# Altium PCB W5500-EVB-Pico_V100.PcbDoc
Units mm, origin at the board's own origin, x right, y up, seen from the top; angles counter-clockwise.
Board outline 75 x 21 mm, 2 copper layers (Top Layer, Bottom Layer); 88 components, 83 nets, 408 pads, 152 vias.
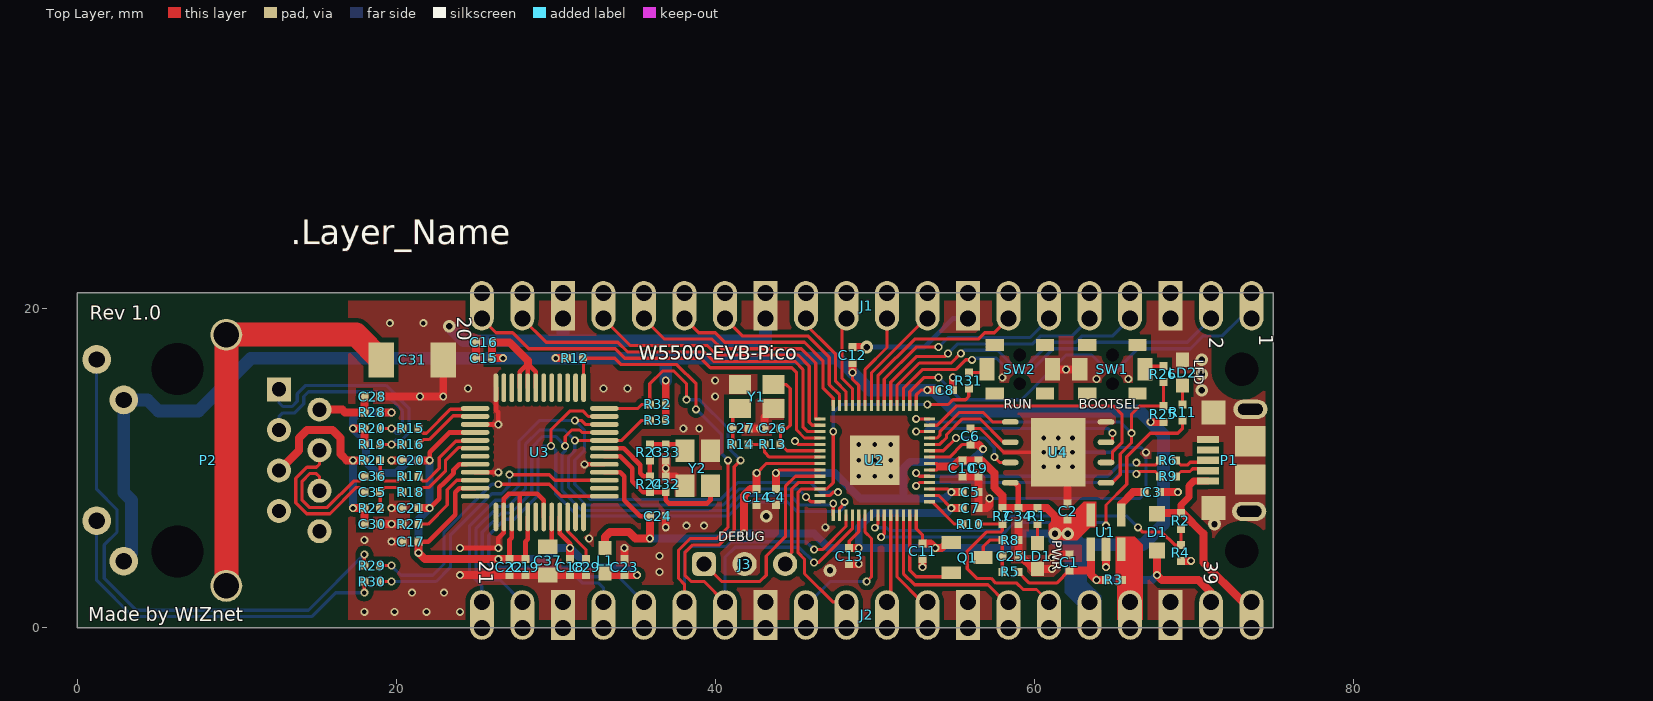
[diagram p0: Top Layer view]
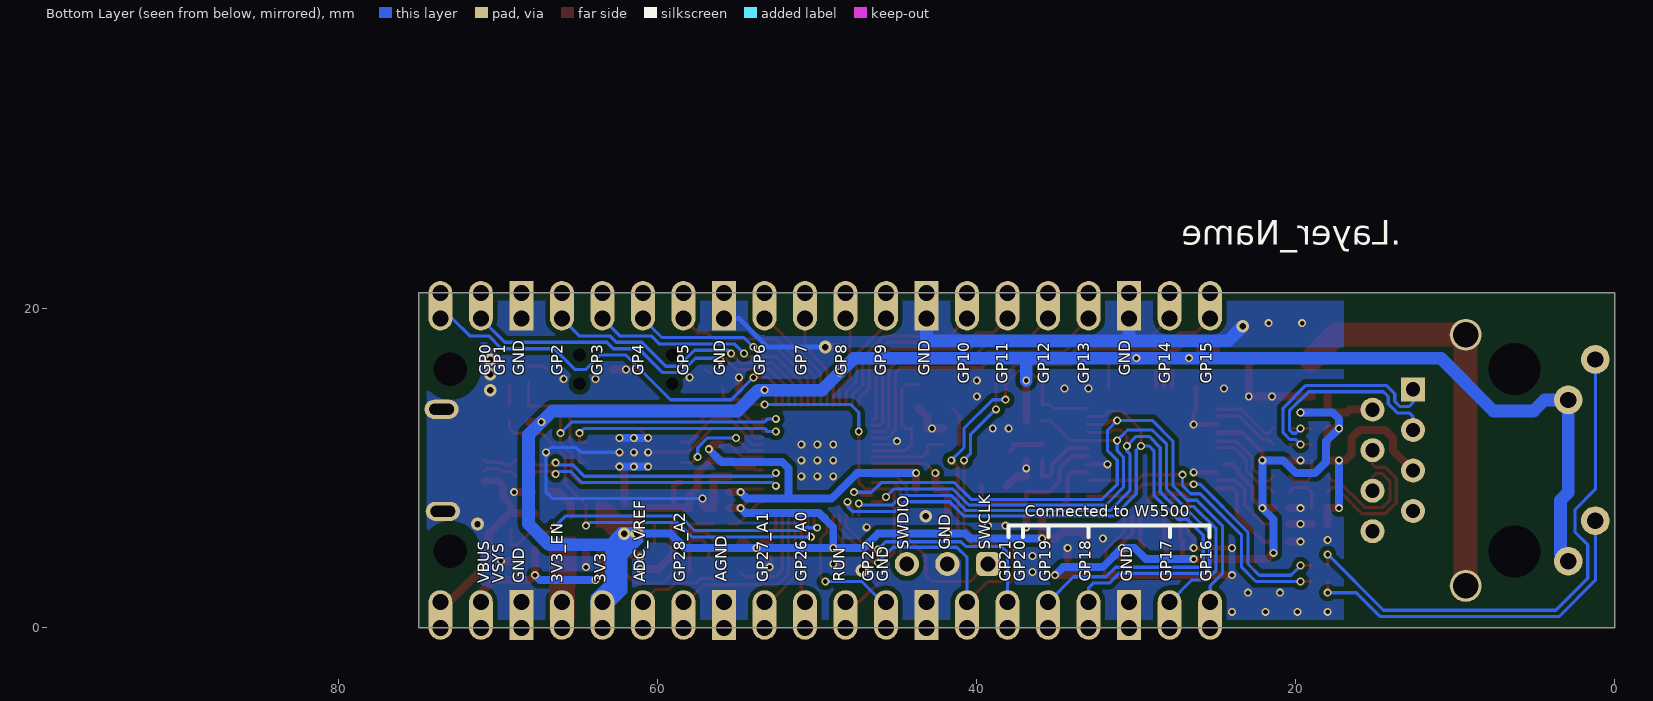
[diagram p1: Bottom Layer view, seen from below]
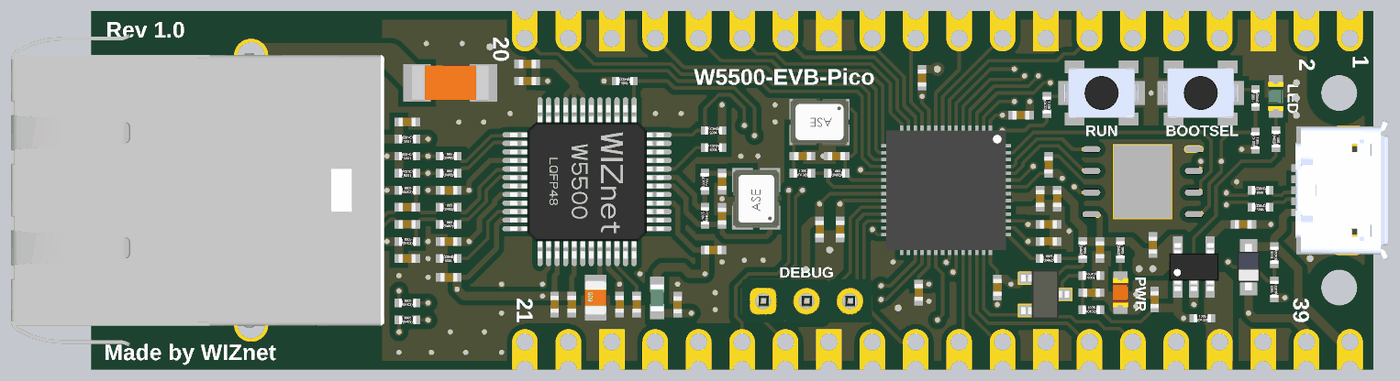
[diagram p2: 3D render of the assembled board from above, using the file's embedded part models]

## Layer stack, top to bottom
Top Solder: solder mask 0.0102, Solder Resist, Dk 3.5
Top Layer: signal copper 0.0356
Dielectric1: prepreg 0.32, FR-4, Dk 4.8
Bottom Layer: signal copper 0.0356
Bottom Solder: solder mask 0.0102, Solder Resist, Dk 3.5

## Board outline
0,0 75,0 75,21 0,21

## Design rules (kind name [scope] priority, off if disabled: settings)
BoardOutlineClearance [All] p1: gap=0.5 ignorepadtopadclearanceinfootprint=FALSE
Clearance [All] p1: gap=0.15 ignorepadtopadclearanceinfootprint=FALSE except(0.3: Arc-Poly Track-Poly SMDPad-Poly THPad-Poly Via-Poly Fill-Poly Poly-Poly Poly-Region Poly-Text Poly-Hole)
DiffPairsRouting [All] p1: maxlimit=0.2 minlimit=0.2 mostfreqgap=0.2 toplayer_minwidth=0.2 toplayer_maxwidth=0.2 toplayer_prefwidth=0.2 bottomlayer_minwidth=0.2 bottomlayer_maxwidth=0.2 bottomlayer_prefwidth=0.2 maxuncoupledlength=15.24
HoleSize [All] p1: absolutevalues=TRUE maxlimit=4.064 minlimit=0.025 maxpercent=80.000 minpercent=20.000
PlaneClearance [All] p1: clearance=0.3
PlaneConnect [All] p1: planeconnectstyle=Direct reliefexpansion=0.508 reliefentries=4 reliefconductorwidth=0.254 reliefairgap=0.254
PolygonConnect [All] p1: connectstyle=Direct reliefconductorwidth=0.6 reliefentries=4 polygonreliefangle="45 Angle" airgapwidth=0.35
RoutingVias [All] p1: holewidth=0.3 width=0.5 viastyle="Through Hole" minholewidth=0.3 minwidth=0.5 maxholewidth=0.5 maxwidth=0.8
SolderMaskExpansion [All] p1: expansion=0 istentingtop=FALSE
Width [All] p1: maxlimit=2 minlimit=0.1 preferedwidth=0.2 minimp=50.000000 maximp=50.000000 favimp=50.000000
26 further rules are at their usual default settings.

## Classes and differential pairs
differential pair NewDifferentialPair5: +NetC36_2 -NetC35_2
differential pair NewDifferentialPair4: +NetC36_1 -NetC35_1
differential pair NewDifferentialPair3: +NetR17_2 -NetR18_2
differential pair NewDifferentialPair2: +NetR15_2 -NetR16_2
differential pair NewDifferentialPair1: +NetP2_1 -NetP2_3

## Components (designator, comment, footprint, x,y, rotation, side; value= is the part's Value field where it differs from the comment)
C1 "1uF" CAP-0402 62.2,4.1 r270 top
C2 "1uF" CAP-0402 62.1,7.3 r270 top
C3 "0.1uF" CAP-0402 67.4,8.5 r180 top
C4 "1uF" CAP-0402 43.8,8.2 r90 top
C5 "0.1uF" CAP-0402 56,8.5 r180 top
C6 "0.1uF" CAP-0402 56,12 r270 top
C7 "1uF" CAP-0402 56,7.5 r180 top
C8 "0.1uF" CAP-0402 54.4,14.9 r180 top
C9 "0.1uF" CAP-0402 56.5,10 r90 top
C10 "0.1uF" CAP-0402 55.5,10 r90 top
C11 "0.1uF" CAP-0402 53,4.8 r90 top
C12 "0.1uF" CAP-0402 48.6,17.1 r270 top
C13 "0.1uF" CAP-0402 48.4,4.5 r90 top
C14 "0.1uF" CAP-0402 42.6,8.2 r90 top
C15 "0.1uF" CAP-0402 25.5,16.9 r0 top
C16 "0.1uF" CAP-0402 25.5,17.9 r0 top
C17 "1uF" CAP-0402 20.9,5.4 r0 top
C18 "0.1uF" CAP-0402 30.9,3.8 r90 top
C19 "0.1uF" CAP-0402 28.1,3.8 r90 top
C20 "1uF" CAP-0402 20.9,10.5 r0 top
C21 "0.1uF" CAP-0402 20.9,7.5 r0 top
C22 "0.1uF" CAP-0402 27.1,3.8 r90 top
C23 "0.1uF" CAP-0402 34.3,3.8 r270 top
C24 "1uF" CAP-0402 36.4,7 r180 top
C25 "0.1uF" CAP-0402 58.5,4.5 r0 top
C26 "15pF" CAP-0402 43.6,12.5 r180 top
C27 "15pF" CAP-0402 41.6,12.5 r0 top
C28 "22nF" CAP-0402 18.5,14.5 r180 top
C29 "0.1uF" CAP-0402 31.9,3.8 r90 top
C30 "0.1uF" CAP-0402 18.5,6.5 r180 top
C31 "1nF/2kV" CAP-1808 21,16.8 r180 top
C32 "18pF" CAP-0402 36.9,9 r270 top
C33 "18pF" CAP-0402 36.9,11 r90 top
C34 "0.1uF" CAP-0402 59,7 r90 top
C35 "6.8nF" CAP-0402 18.5,8.5 r180 top
C36 "6.8nF" CAP-0402 18.5,9.5 r180 top
C37 "4.7uF" CAP-0805 29.5,4.2 r90 top
D1 "BAT60A" SOD-323(1-C,2-A) 67.7,6 r90 top
J1 "2.54mm 1x20 Pin Header DIP" IDC-1X20 73.63,19.39 r180 top
J2 "2.54mm 1x20 Pin Header DIP" IDC-1X20 25.37,1.61 r0 top
J3 "2.54mm 1x3 Pin Header DIP" IDC-1X3 39.3,4 r0 top
L1 "HH-1M1608-121JT" IND-0603 33.1,4.2 r270 top
LD1 "Red" LED-0603-RED 60.2,4.5 r270 top
LD2 "Green" LED-0603-GREEN 69.3,16 r90 top
P1 "Micro USB" "MICRO 5P B DBX 6.4" 75,10.5 r180 top
P2 "J1B1211CCD" RJ45-J1B1211CCD -1.5,10.5 r270 top locked
Q1 "Q-2N7002" SOT23-3L 55.8,4.4 r270 top
R1 "470R" RES-0402 60.2,7 r270 top
R2 "5.6K" RES-0402 69.2,6.7 r90 top
R3 "100K" RES-0402 65,3 r0 top
R4 "10K" RES-0402 69.2,4.7 r90 top
R5 "200K" RES-0402 58.5,3.5 r0 top
R6 "27R" RES-0402 68.4,10.5 r180 top
R7 "200R" RES-0402 58,7 r270 top
R8 "100K" RES-0402 58.5,5.5 r180 top
R9 "27R" RES-0402 68.4,9.5 r180 top
R10 "1R" RES-0402 56,6.5 r0 top
R11 "470R" RES-0402 69.3,13.5 r270 top
R12 "4.7K" RES-0402 31.2,16.9 r180 top
R13 "NC" RES-0402 43.6,11.5 r0 top
R14 "1K" RES-0402 41.6,11.5 r0 top
R15 "3.3R" RES-0402 20.9,12.5 r0 top
R16 "3.3R" RES-0402 20.9,11.5 r0 top
R17 "3.3R" RES-0402 20.9,9.5 r0 top
R18 "3.3R" RES-0402 20.9,8.5 r0 top
R19 "49.9R" RES-0402 18.5,11.5 r180 top
R20 "49.9R" RES-0402 18.5,12.5 r180 top
R21 "49.9R" RES-0402 18.5,10.5 r0 top
R22 "49.9R" RES-0402 18.5,7.5 r0 top
R23 "0R" RES-0402 35.9,11 r270 top
R24 "1M" RES-0402 35.9,9 r90 top
R25 "NC" RES-0402 68.1,13.4 r270 top
R26 "1K" RES-0402 68.1,15.9 r90 top
R27 "12.4K/1%" RES-0402 20.9,6.5 r180 top
R28 "10R/1%" RES-0402 18.5,13.5 r180 top
R29 "470R" RES-0402 18.5,3.9 r0 top
R30 "470R" RES-0402 18.5,2.9 r0 top
R31 "1K" RES-0402 55.9,15.5 r270 top
R32 "4.7K" RES-0402 36.4,14 r180 top
R33 "4.7K" RES-0402 36.4,13 r180 top
SW1 "PTS820" PTS820 64.9,16.2 r180 top
SW2 "PTS820" PTS820 59.1,16.2 r0 top
U1 "LM8805SF5-33V" SOT-23-5L 64.5,6 r90 top
U2 "RP2040" QFN56(0.4/7X7) 50,10.5 r270 top locked
U3 "W5500" W5500-LQFP48 29,11 r0 top
U4 "W25Q16JVZPIM" WSON8(6X5_1.27) 61.5,11 r180 top
Y1 "12MHz" OSC-TZ1067B 42.6,14.5 r180 top
Y2 "25MHz" OSC-82J0626 38.9,10 r90 top

## Footprints (in the part's own frame and the unit in brackets; to place one, negate y for a bottom-side part, rotate by r counter-clockwise, add the part's x,y. Pads: shape width x height; smd on the part's side, far side on the other; paste and mask are expansions set on the pad)
CAP-0402 [mm]
  rect 0.5x0.5 smd: 1(-0.5,0) 2(0.5,0)
  body extent -0.48,-0.25 0.52,0.25, height 0.6
CAP-0805 [mil]
  rect 36x49 smd: 1(-35,0)
  rect 35.43x49 smd: 2(35,0)
  body extent -39,-25 40,25, height 31
CAP-1808 [mm] "Ceramic CAP 1808(4520)"
  rect 1.6x2.2 smd: 1(-1.95,0) 2(1.95,0)
  body extent -2.25,-1.02 2.25,1.01, height 2
IDC-1X3 [mil]
  rrect50% 60x60 hole 36: 1(0,0)
  round 60 hole 36: 2(100,0) 3(200,0)
  body extent -49,-49 251,51, height 336
IDC-1X20 [mm]
  oval 1.5x2.5 hole 1 copper offset 0,-0.5: 1(0,0) 2(2.54,0) 4(7.62,0) 5(10.16,0) 6(12.7,0) 7(15.24,0) 9(20.32,0) 10(22.86,0) 11(25.4,0) 12(27.94,0) 14(33.02,0) 15(35.56,0) 16(38.1,0) 17(40.64,0) 19(45.72,0) 20(48.26,0)
  oval 1.5x2.5 hole 1 copper offset 0,0.5: 1(0,-1.61) 2(2.54,-1.61) 4(7.62,-1.61) 5(10.16,-1.61) 6(12.7,-1.61) 7(15.24,-1.61) 9(20.32,-1.61) 10(22.86,-1.61) 11(25.4,-1.61) 12(27.94,-1.61) 14(33.02,-1.61) 15(35.56,-1.61) 16(38.1,-1.61) 17(40.64,-1.61) 19(45.72,-1.61) 20(48.26,-1.61)
  rect 1.5x2.5 hole 1 copper offset 0,0.5: 3(5.08,-1.61) 8(17.78,-1.61) 13(30.48,-1.61) 18(43.18,-1.61)
  rect 1.5x2.5 hole 1 copper offset 0,-0.5: 3(5.08,0) 8(17.78,0) 13(30.48,0) 18(43.18,0)
IND-0603 [mm] "Inductor 0603(1608)"
  rect 0.89x0.82 smd: 1(-0.8,0) 2(0.8,0)
  body extent -0.8,-0.4 0.8,0.4, height 0.95
LED-0603-GREEN [mm] "LED-0603-GREEN"
  rect 0.89x0.82 smd: 1(-0.8,0) 2(0.8,0)
  body extent -0.85,-0.45 0.85,0.45, height 0.9
LED-0603-RED [mm] "LED-0603-RED"
  rect 0.89x0.82 smd: 1(-0.8,0) 2(0.8,0)
  body extent -0.85,-0.45 0.85,0.45, height 0.9
"MICRO 5P B DBX 6.4" [mm]
  rect 1.38x0.45 smd: 1(4.11,1.3) 2(4.11,0.65) 3(4.11,0) 4(4.11,-0.65) 5(4.11,-1.3)
  oval 2.15x1.2 hole 0.7 slot 1.55 at 0 deg: 6(1.524,3.2) 7(1.45,-3.2)
  rect 1.9x1.9 smd: 8(1.45,1.2) 9(1.45,-1.2)
  rect 1.5x1.5 smd: 10(3.75,-3) 11(3.75,3)
  body extent -0.88,-4.1 4.55,4.1, height 2.68
OSC-82J0626 [mm]
  rect 1.4x1.2 smd: 1(-1.1,-0.8) 2(1.1,-0.8) 3(1.1,0.8) 4(-1.1,0.8)
  body extent -1.7,-1.35 1.7,1.35, height 1.06
OSC-TZ1067B [mm]
  rect 1.4x1.2 smd: 1(-1.05,-0.75) 2(1.05,-0.75) 3(1.05,0.75) 4(-1.05,0.75)
  body extent -1.7,-1.35 1.7,1.35, height 1.06
PTS820 [mm]
  rect 1.15x0.75 smd: 0(-1.575,1.525) 0(-1.575,-1.525) 0(1.575,1.525) 0(1.575,-1.525)
  round 0 hole 0.8: 0(0,0.9) 0(0,-0.9)
  rect 0.95x1.4 smd: 1(-2.05,0) 2(2.05,0)
  body extent -2.18,-1.45 2.18,1.45, height 1.7
QFN56(0.4/7X7) [mm]
  rect 0.7x0.2 smd: 1(-3.44,2.6) 2(-3.44,2.2) 3(-3.44,1.8) 4(-3.44,1.4) 5(-3.44,1) 6(-3.44,0.6) 7(-3.44,0.2) 8(-3.44,-0.2) 9(-3.44,-0.6) 10(-3.44,-1) 11(-3.44,-1.4) 12(-3.44,-1.8) 13(-3.44,-2.2) 14(-3.44,-2.6) 29(3.44,-2.6) 30(3.44,-2.2) 31(3.44,-1.8) 32(3.44,-1.4) 33(3.44,-1) 34(3.44,-0.6) 35(3.44,-0.2) 36(3.44,0.2) 37(3.44,0.6) 38(3.44,1) 39(3.44,1.4) 40(3.44,1.8) 41(3.44,2.2) 42(3.44,2.6)
  rect 0.2x0.7 smd: 15(-2.6,-3.44) 16(-2.2,-3.44) 17(-1.8,-3.44) 18(-1.4,-3.44) 19(-1,-3.44) 20(-0.6,-3.44) 21(-0.2,-3.44) 22(0.2,-3.44) 23(0.6,-3.44) 24(1,-3.44) 25(1.4,-3.44) 26(1.8,-3.44) 27(2.2,-3.44) 28(2.6,-3.44) 43(2.6,3.44) 44(2.2,3.44) 45(1.8,3.44) 46(1.4,3.44) 47(1,3.44) 48(0.6,3.44) 49(0.2,3.44) 50(-0.2,3.44) 51(-0.6,3.44) 52(-1,3.44) 53(-1.4,3.44) 54(-1.8,3.44) 55(-2.2,3.44) 56(-2.6,3.44)
  rect 3.1x3.1 smd: 57(0,0)
  body extent -3.5,-3.5 3.5,3.5, height 0.8
RES-0402 [mm]
  rect 0.5x0.5 smd: 1(-0.5,0) 2(0.5,0)
  body extent -0.5,-0.25 0.5,0.25, height 0.35
RJ45-J1B1211CCD [mm]
  rect 1.5x1.5 hole 0.9: 1(-4.445,14.15)
  round 1.5 hole 0.9: 2(-3.175,16.69) 3(-1.905,14.15) 4(-0.635,16.69) 5(0.635,14.15) 6(1.905,16.69) 7(3.175,14.15) 8(4.445,16.69)
  round 1.8 hole 1.02: 9(-6.325,2.72) 10(-3.785,4.42) 11(3.785,2.72) 12(6.325,4.42)
  round 2 hole 1.6: S1(-7.875,10.85) S2(7.875,10.85)
  round 1.8 hole 3.25: ""(-5.715,7.8) ""(5.715,7.8)
  body extent -9.16,-3.2 9.16,18.64, height 15.09
SOD-323(1-C,2-A) [mm]
  rect 1x1 smd: 1(-1.15,0) 2(1.15,0)
  body extent -1.35,-0.67 1.35,0.68, height 0.79
SOT23-3L [mm]
  rect 0.8x1.2 smd paste-0.07: 1(-0.95,-1) 2(0.95,-1) 3(0,1)
  body extent -1.45,-1.4 1.45,1.4, height 1.28
SOT-23-5L [mm]
  rect 1.45x0.55 smd: 1(-1.075,0.95) 2(-1.075,0) 3(-1.075,-0.95) 4(1.075,-0.95) 5(1.075,0.95)
  body extent -1.4,-1.45 1.4,1.45, height 1.45
W5500-LQFP48 [mm]
  oval 1.8x0.3 smd: 1(-4.05,2.75) 2(-4.05,2.25) 3(-4.05,1.75) 4(-4.05,1.25) 5(-4.05,0.75) 6(-4.05,0.25) 7(-4.05,-0.25) 8(-4.05,-0.75) 9(-4.05,-1.25) 10(-4.05,-1.75) 11(-4.05,-2.25) 12(-4.05,-2.75) 25(4.05,-2.75) 26(4.05,-2.25) 27(4.05,-1.75) 28(4.05,-1.25) 29(4.05,-0.75) 30(4.05,-0.25) 31(4.05,0.25) 32(4.05,0.75) 33(4.05,1.25) 34(4.05,1.75) 35(4.05,2.25) 36(4.05,2.75)
  oval 0.3x1.8 smd: 13(-2.75,-4.05) 14(-2.25,-4.05) 15(-1.75,-4.05) 16(-1.25,-4.05) 17(-0.75,-4.05) 18(-0.25,-4.05) 19(0.25,-4.05) 20(0.75,-4.05) 21(1.25,-4.05) 22(1.75,-4.05) 23(2.25,-4.05) 24(2.75,-4.05) 37(2.75,4.05) 38(2.25,4.05) 39(1.75,4.05) 40(1.25,4.05) 41(0.75,4.05) 42(0.25,4.05) 43(-0.25,4.05) 44(-0.75,4.05) 45(-1.25,4.05) 46(-1.75,4.05) 47(-2.25,4.05) 48(-2.75,4.05)
  body extent -4.5,-4.5 4.5,4.5, height 1.65
WSON8(6X5_1.27) [mm]
  oval 1.05x0.35 smd mask+0.05: 1(-3,1.905) 2(-3,0.635) 3(-3,-0.635) 4(-3,-1.905) 5(3,-1.905) 6(3,-0.635) 7(3,0.635) 8(3,1.905)
  rect 3.4x4.3 smd mask+0.05: 9(0,0)
  body extent -3,-2.5 3,2.5, height 0.8

## Part data
C1 C2 C3 C4 C5 C6 C7 C8 C9 C10 C11 C12 C13 C14 C15 C16 C17 C18 C19 C20 C21 C22 C23 C24 C25 C26 C27 C28 C29 C30 C32 C33 C34 C35 C36: library part CAP-0402, "Ceramic CAP 0402(1005)"
C31: library part CAP-1808, "Ceramic CAP 1808(4520)"
C37: library part CAP-0805, "Ceramic CAP 0805(2012)"
D1: library part DIODE-BAT60A, "Silicon Schottky Diode"
L1: library part IND-0603, "Inductor 0603(1608)"
LD1 LD2: library part LED-0603, "LED-0603"
P1: library part "Micro USB 5P DBX6.4", "Micro USB B Connector SMD"
Q1: "N-Channel 60-V (D-S) MOSFET"
R1 R2 R3 R4 R5 R6 R7 R8 R9 R10 R11 R12 R13 R14 R15 R16 R17 R18 R19 R20 R21 R22 R23 R24 R25 R26 R27 R28 R29 R30 R31 R32 R33: library part RES-0402, "RES-0402"
SW1 SW2: library part ITS-1107(SMD), "TACT Switch (SMD)"
U1: "600mA CMOS LDO Regulator"
U2: "Raspverry Pi, Dual ARM Cortex-M0+ @ 133MHz"
U3: "WIZnet Hardwired TCP/IP Chip"
U4: "3V 16M-BIT / SERIAL FLASH MEMORY WITH / DUAL/QUAD SPI, QPI & DTR"
Y1: library part OSC-TZ1067B-12MHz, "X-tal 12MHz,3.2x2.5 SMD, CL=20pF"
Y2: library part OSC-82J0626-25MHz, "X-tal 25MHz,3.2x2.5 SMD, CL=18pF"

## Free pads (board coordinates)
  round 0 hole 2.1 unplated: 0(73,4.8) 0(73,16.2)
  round 0 on Mech16 paste+0 mask+0: 1(93.2,16.4) 1(96.4,35.9)

## Via types
v1: diameter 0.5, hole 0.3, Top Layer to Bottom Layer, tented both sides, 142 vias
v2: diameter 0.8, hole 0.4, Top Layer to Bottom Layer, tented both sides, 10 vias

## Nets (pads, with @x,y where several pads share a name; then routed paths per layer and width w, separated by ;. In a path a pad name is that pad's centre, name@x,y a point inside that pad or via, vN(x,y) a via of type N, cw(c..) or ccw(c..) an arc to the next point about the centre after c; other vN are vias at no path point)
1V1: C4.2 C5.2 C6.2 U2.23 U2.45 U2.50 | length 29
  Top Layer w0.2: v1(43.8,9.7) 44,9.9 U2.23 ; U2.45 54.6,8.7 v1(54.8,8.5) ; U2.50 54.7,10.7 55.5,11.5 C6.2
  Top Layer w0.5: C4.2 v1(43.8,9.7) ; v1(54.8,8.5) C5.2 ; C6.2 56.5,11.5 v1(56.8,11.2)
  Bottom Layer w0.5: v1(43.8,9.7) 47.5,9.7 49.1,8.1 51.8,8.1 ; v1(54.8,8.5) 54.4,8.1 51.8,8.1 ; v1(56.8,11.2) 56,10.4 52.2,10.4 51.8,10 51.8,8.1
3V3: C2.2 C7.2 C8.2 C9.2 C10.2 C11.2 C12.2 C13.2 C14.2 C15.2 C16.2 C24.2 C34.2 J2.16 L1.1 P2.10 P2.12 Q1.1 R1.1 R7.1 R12.2 R25.2 R32.1 R33.1 U1.5 U2.1 U2.10 U2.22 U2.33 U2.42 U2.44 U2.48 U2.49 U3.28 U3.43 U3.44 U3.45 U4.8 | length 187.8
  Top Layer w0.2: v1(42.6,9.7) 43.2,10.3 U2.22 ; C13.2 48.4,5.434 49,6.034 49,6.3 U2.33 ; v1(48.6,16) 48.6,15.6 49,15.2 U2.10 ; U2.42 52.6,6.2 53,5.8 C11.2 ; U2.1 52.6,14.6 52.9,14.9 v1(53.3,14.9) ; U2.44 54,8.3 v1(54.8,7.5) ; U2.48 53.9,9.9 54.1,10.1 53.9,10.3 U2.49 ; Q1.1 Q1.1@54.85,5.3
  Top Layer w0.3: U3.45 27.75,16.05 28.25,16.55 ; U3.44 28.25,16.55 ; U3.43 28.75,16.05 28.25,16.55 ; U3.28 34.05,9.75 34.3,9.5 34.3,8 35.3,7 C24.2
  Top Layer w0.35: U4.8 58.805,9.095 59,8.9 C34.2
  Top Layer w0.5: v1(26.7,16.9) C15.2 C16.2 27.1,17.9 28.25,16.75 28.25,16.55 ; v1(30,16.9) R12.2 ; L1.1 33.1,5.7 33.4,6 34.6,6 35,5.6 v1(35.9,5.6) C24.2 ; R33.1 R32.1 v1(36.9,15.5) ; v1(41.8,5.9) 41.8,8.3 42.2,8.7 C14.2 v1(42.6,9.7) ; C13.2 v1(49,5) ; v1(48.6,16) C12.2 ; C11.2 53.5,5.3 v1(53.8,5) 54.2,5 54.55,5.35 Q1.1 ; v1(53.3,14.9) C8.2 ; 54.1,10.1 54.9,10.1 55.3,10.5 C10.2 C9.2 56.7,10.5 57.5,9.7 57.5,8.8 58,8.3 R7.1 C34.2 R1.1 60.8,7.5 61.3,7 v2(61.3,5.9) ; v1(54.8,7.5) C7.2 ; v1(67.3,12.9) R25.2
  Bottom Layer w0.5: v1(35.9,5.6) 40.4,5.6 40.7,5.9 v1(41.8,5.9) 46.2,5.9 47.1,5 v1(49,5) ; v1(54.8,7.5) 54.5,7.2 49.9,7.2 49,6.3 v1(49,5) ; v2(61.3,5.9) 59.2,5.9 58.3,5 v1(53.8,5) v1(49,5)
  Bottom Layer w0.8: P2.12 3.4,4.655 3.4,8 2.92,8.48 P2.10 4.415,14.285 5.1,13.6 7.6,13.6 10.9,16.9 v1(26.7,16.9) v1(30,16.9) 36.9,16.9 ; v1(36.9,15.5) 36.9,16.9 ; v2(62.1,5.9) 62.8,5.2 66.8,5.2 68.1,6.5 68.1,12.1 v1(67.3,12.9) 66.6,13.6 55,13.6 53.7,14.9 v1(53.3,14.9) 49.7,14.9 v1(48.6,16) 47.7,16.9 36.9,16.9
3V3_EN: J2.17 R3.2 U1.3
3V3A: C17.2 C18.2 C19.2 C20.2 C21.2 C22.2 C23.2 L1.2 R19.2 R20.2 R28.1 U3.4 U3.8 U3.11 U3.15 U3.17 U3.21 | length 61.3
  Top Layer w0.3: C17.2 22,5.4 23.7,7.1 23.7,8.5 23.95,8.75 U3.11 ; v1(22.1,7.5) 22.7,8.1 22.7,8.798 23,9.098 23.6,9.698 23.6,9.9 23.95,10.25 U3.8@24.4,10.25 ; v1(22.1,10.5) 22.1,11 23.35,12.25 U3.4 ; C22.2 27.1,5.5 27.25,5.65 U3.15 ; C19.2 28.1,5.4 28.25,5.55 U3.17 ; U3.21 30.25,5.914 30.9,5.264 v1(30.9,5)
  Top Layer w0.5: v1(17.3,12.5) R20.2 R19.2 ; R28.1 v1(19.7,13.5) ; C17.2 v1(21.4,4.7) 21.8,4.3 v1(26.4,4.3) C22.2 C19.2 ; C21.2 v1(22.1,7.5) ; C20.2 v1(22.1,10.5) ; C18.2 v1(30.9,5) ; L1.2 33.2,3.3 C23.2 v1(35.1,3.3)
  Bottom Layer w0.5: v1(19.7,13.5) 17.7,13.5 17.3,13.1 v1(17.3,12.5) 18.1,11.7 18.1,10.4 18.8,9.7 20,9.7 20.8,10.5 v1(22.1,10.5) v1(22.1,7.5) 21.4,6.8 v1(21.4,4.7) ; v1(26.4,4.3) 29.4,4.3 30.1,5 v1(30.9,5) 32.1,3.8 34.6,3.8 v1(35.1,3.3)
ACTn: R30.2 U3.27 | length 18.6
  Top Layer w0.2: R30.2 v1(19.7,2.9) ; v1(27.1,9.6) 29.6,9.6 29.95,9.25 U3.27
  Bottom Layer w0.2: v1(19.7,2.9) 22.5,2.9 23.4,3.8 23.4,5.8 26,8.4 26.6,8.4 27.1,8.9 v1(27.1,9.6)
ADC_VREF: J2.15 R7.2 R10.2 | length 11.7
  Top Layer w0.2: R10.2 R7.2 58,6.1 57.9,6 57,6 55.8,4.8 55.8,3.7 56.4,3.1 57.3,3.1 57.6,2.8 58.9,2.8 59.3,2.4 60.14,2.4 J2.15@60.93,1.61
CHGND: C31.2 P2.S1 P2.S2 | length 26.1
  Top Layer w1.5: P2.S2 P2.S1 17.475,18.375 C31.2
GND: C1.1 C2.1 C3.1 C4.1 C5.1 C6.1 C7.1 C8.1 C9.1 C10.1 C11.1 C12.1 C13.1 C14.1 C15.1 C16.1 C17.1 C18.1 C19.1 C20.1 C21.1 C22.1 C23.1 C24.1 C25.2 C26.2 C27.2 C28.1 C29.1 C30.1 C31.1 C32.1 C33.1 C34.1 C37.1 J1.3 J1.8 J1.13 J1.18 J2.3 J2.8 J2.13 J2.18 J3.2 LD1.2 LD2.2 P1.5 P1.6 P1.7 P1.8 P1.9 P1.10 P1.11 R4.1 R8.1 R27.2 SW1.2 SW2.2 U1.2 U2.19 U2.57 U3.3 U3.9 U3.14 U3.16 U3.19 U3.29 U3.48 U4.4 U4.9 Y1.2 Y1.4 Y2.2 Y2.4 | length 120.6
  Top Layer w0.2: v1(45,11.7) 45.2,11.5 U2.19 ; C6.1 56.6,12.5 58.1,11 v1(60.6,11) ; v1(60.6,11.9) U4.9@61.1,12.4
  Top Layer w0.3: v1(24,5) v1(26.4,5) 26.4,5.6 26.75,5.95 U3.14 26.75,8.1 27.05,8.4 27.75,8.4 ; U3.9 v1(26.4,9.75) ; U3.3 v1(26.4,12.75) 26.4,13.5 26.25,13.65 U3.48 ; U3.16 27.75,8.4 ; U3.19 29.25,8 28.85,8.4 27.75,8.4 ; v1(31.8,10.25) U3.29
  Top Layer w0.5: C30.1 v1(19.7,6.5) R27.2 ; C28.1 v1(22.95,14.5) C31.1 ; v1(19.7,5.4) C17.1 ; v1(19.7,7.5) C21.1 ; v1(19.7,10.5) C20.1 ; v1(24,3.3) C22.1 C19.1 29.489,3.3 C37.1 29.511,3.3 C18.1 C29.1 ; C15.1 C16.1 ; C23.1 v1(34.3,5) ; v1(36.9,6.3) C24.1 ; C33.1 v1(36.9,10) C32.1 37.5,9.5 Y2.4 ; C27.2 v1(42.8,12.5) C26.2 43.1,13.2 Y1.4 ; C13.1 v1(49,4) ; C12.1 v2(49.5,17.6) ; v1(53,3.8) C11.1 ; C8.1 v1(54.9,15.7) ; C10.1 C9.1 C5.1 C7.1 57,7.5 57.2,7.7 v1(57.2,8.1) ; C34.1 R8.1 C25.2 59.137,4.5 59.937,3.7 LD1.2 v1(61.1,3.7) ; v1(61.1,4.4) 61.3,4.6 C1.1 ; SW2.2 v1(62,16.2) SW1.2 ; C2.1 62.1,9.8 v1(62.4,10.1) ; v1(64.5,3.8) U1.2 ; C3.1 v1(69,8.5) ; R4.1 v1(69.825,4.2)
  Bottom Layer w0.2: v1(57.2,8.1) 66.6,8.1 67,8.5 v1(67,11) 66.7,11.3 65.1,11.3 64.8,11 v1(62.4,11)
  Bottom Layer w0.3: v2(49.5,17.6) 53.1,17.6 54.89,19.39 J1.8@55.85,19.39
  Bottom Layer w0.5: v1(60.6,10.1) v1(61.5,10.1) v1(62.4,10.1) ; v1(60.6,11.9) v1(61.5,11.9) v1(62.4,11.9)
  Bottom Layer w0.8: v2(23.322,18.9) 24.222,18 30.45,18 ; J1.18@30.45,19.39 30.45,18 ; J1.13@43.15,19.39 43.15,18 30.45,18
  other v1: 18,1 19.9,1 21.9,1 24,1 21,2.2 23,2.2 36.5,3.5 36.5,4.5 18,5.5 32.1,5.6 46.9,6.3 38.2,6.4 39.3,6.4 49,9.5 50,9.5 51,9.5 49,10.5 50,10.5 51,10.5 61.5,11 49,11.5 50,11.5 51,11.5 38,12.5 39,12.5 21.5,14.5 40,14.5 24.5,15 33,15 34.5,15 40,15.5 63.9,15.6 65.9,15.6 58,15.7 19.6,19.1 21.7,19.1
  other v2: 47.2,3.6 71.3,6.5 43.2,7 70.5,14.9 70.5,15.9 70.5,16.8
GPIO0: J1.1 U2.2 | length 26.1
  Top Layer w0.2: U2.2 52.2,14.8 53.1,15.7 v1(54,15.7)
  Bottom Layer w0.2: v1(54,15.7) 55.4,14.3 59.2,14.3 62,17.1 63.6,17.1 64.5,16.2 65.2,16.2 66.5,17.5 69.8,17.5 70.6,18.3 71.8,18.3 72.89,19.39 J1.1@73.63,19.39
GPIO1: J1.2 U2.3 | length 22.9
  Top Layer w0.2: U2.3 51.8,15 53,16.2 55.1,16.2 55.7,16.8 v1(56.1,16.8)
  Bottom Layer w0.2: v1(56.1,16.8) 56.2,16.9 57.634,16.9 58.534,16 59.7,16 61.2,17.5 62.8,17.5 63.2,17.9 69.6,17.9 J1.2@71.09,19.39
GPIO2: J1.4 U2.4 | length 20
  Top Layer w0.2: U2.4 51.4,15.2 52.8,16.6 54.8,16.6 v1(55.4,17.2) ; J1.4@66.01,19.41 J1.4@66.01,21
  Bottom Layer w0.2: v1(55.4,17.2) 55.6,17.4 57.7,17.4 58.7,16.4 59.5,16.4 61,17.9 62.6,17.9 63,18.3 64.92,18.3 J1.4@66.01,19.39
GPIO3: J1.5 U2.5 | length 15.6
  Top Layer w0.2: U2.5 51,15.4 52.6,17 54.4,17 v1(54.6,17.2)
  Bottom Layer w0.2: v1(54.6,17.2) 55.2,17.8 59.906,17.8 60.406,18.3 62.38,18.3 J1.5@63.47,19.39
GPIO4: J1.6 U2.6 | length 13.6
  Top Layer w0.2: U2.6 50.6,15.6 52.6,17.6 v1(54,17.6)
  Bottom Layer w0.2: v1(54,17.6) 54.6,18.2 59.74,18.2 J1.6@60.93,19.39
GPIO5: J1.7 U2.7 | length 11.5
  Top Layer w0.2: U2.7 50.2,15.8 52.5,18.1 56.5,18.1 56.9,18.5 57.5,18.5 J1.7@58.39,19.39
GPIO6: J1.9 U2.8 | length 7.6
  Top Layer w0.2: U2.8 49.8,15.456 49.8,16 53.19,19.39 53.31,19.39 J1.9@53.31,18.81
GPIO7: J1.10 U2.9 | length 6
  Top Layer w0.2: U2.9 49.4,16.2 50.77,17.57 J1.10@50.77,19.39
GPIO8: J1.11 U2.11 | length 5.8
  Top Layer w0.2: J1.11@47.95,19.17 47.95,15.65 48.6,15 U2.11 ; J1.11@48.23,19.39 J1.11@48.45,19.17
GPIO9: J1.12 U2.12 | length 6.8
  Top Layer w0.2: J1.12@45.31,19.39 47.55,17.15 47.55,15.45 48.2,14.8 U2.12 ; J1.12@45.69,19.39 J1.12@45.81,19.39
GPIO10: J1.14 U2.13 | length 12.4
  Top Layer w0.2: J1.14@40.61,21 40.61,19.39 41.7,18.3 45.8,18.3 47.15,16.95 47.15,15.25 47.8,14.6 U2.13
GPIO11: J1.15 U2.14 | length 14.5
  Top Layer w0.2: J1.15@38.07,21 38.07,19.39 38.96,18.5 40,18.5 40.6,17.9 45.6,17.9 46.75,16.75 46.75,15.05 47.4,14.4 U2.14
GPIO12: J1.16 U2.15 | length 15.7
  Top Layer w0.2: J1.16@35.53,19.39 36.82,18.1 39.8,18.1 40.4,17.5 45.4,17.5 46.3,16.6 46.3,13.1 U2.15
GPIO13: J1.17 U2.16 | length 18.4
  Top Layer w0.2: J1.17@32.99,19.39 34.68,17.7 39.5,17.7 40.1,17.1 45.2,17.1 45.9,16.4 45.9,12.886 46.086,12.7 U2.16
GPIO14: J1.19 U2.17 | length 23.7
  Top Layer w0.2: J1.19@27.91,19.39 29.4,17.9 33.9,17.9 34.5,17.3 39.3,17.3 39.9,16.7 45,16.7 45.5,16.2 45.5,12.6 45.8,12.3 U2.17
GPIO15: J1.20 U2.18 | length 26.4
  Top Layer w0.2: J1.20@25.37,19.39 26.26,18.5 27.3,18.5 28.3,17.5 33.734,17.5 34.334,16.9 39.1,16.9 39.7,16.3 44.8,16.3 45.1,16 45.1,12.4 45.6,11.9 U2.18
GPIO16: J2.1 U2.27 U3.34 | length 42.9
  Top Layer w0.2: v1(31.2,13) 31.6,13 31.85,12.75 U3.34 ; U2.27 47.2,8.3 47.4,8.5 v1(47.7,8.5)
  Bottom Layer w0.2: J2.1@25.37,0 25.37,1.61 25.37,2.63 24.6,3.4 24.6,6.4 26.2,8 26.8,8 27.7,8.9 27.7,11.7 29,13 v1(31.2,13) 31.8,12.4 31.8,11.1 31.2,10.5 31.2,9 32.15,8.05 40.35,8.05 41.4,9.1 46,9.1 46.6,8.5 v1(47.7,8.5)
GPIO17: J2.2 R33.2 U2.28 U3.32 | length 42.3
  Top Layer w0.2: v1(31.2,11.75) U3.32 34.15,11.75 35.4,13 R33.2 ; v1(45.7,8.2) 46,7.9 U2.28
  Bottom Layer w0.2: J2.2@27.91,1.61 26.52,3 25.6,3 25,3.6 25,6.2 26.4,7.6 27,7.6 28.1,8.7 28.1,11.5 29,12.4 30.55,12.4 v1(31.2,11.75) 31.2,11.1 30.8,10.7 30.8,8.8 31.9,7.7 40.5,7.7 41.5,8.7 45.2,8.7 v1(45.7,8.2)
GPIO18: J2.4 U2.29 U3.33 | length 47.5
  Top Layer w0.2: v1(30.595,11.397) 30.595,11.995 31,12.4 31.5,12.4 31.65,12.25 U3.33 ; U2.29 v1(47.4,7.8)
  Bottom Layer w0.2: J2.4@32.99,0 32.99,1.61 32.99,2.51 32.7,2.8 31.7,2.8 31.1,3.4 25.8,3.4 25.4,3.8 25.4,6 26.6,7.2 27.2,7.2 28.5,8.5 28.5,11.3 29.2,12 29.993,12 v1(30.595,11.397) v1(30.595,11.397) 30.6,11.4 30.6,11.1 30.4,10.9 30.4,8.6 31.65,7.35 40.65,7.35 41.6,8.3 44.7,8.3 45.3,7.7 47.3,7.7 v1(47.4,7.8)
GPIO19: J2.5 U2.30 U3.35 | length 49.2
  Top Layer w0.2: v1(29.7,11.4) 29.7,12.4 30.9,13.6 31.7,13.6 32.05,13.25 U3.35 ; U2.30 47.8,7.5 48.1,7.8 v1(48.1,7.9)
  Bottom Layer w0.2: J2.5@35.53,1.61 33.94,3.2 31.9,3.2 31.3,3.8 26,3.8 25.8,4 25.8,5.8 26.8,6.8 27.4,6.8 28.9,8.3 28.9,11.1 29.2,11.4 v1(29.7,11.4) 29.75,11.4 30,11.15 30,8.4 31.4,7 40.8,7 41.7,7.9 44.5,7.9 45.1,7.3 47.8,7.3 48.1,7.6 v1(48.1,7.9)
GPIO20: J2.6 R12.1 U2.31 U3.37 | length 44.8
  Top Layer w0.2: U3.37 31.75,16.85 R12.1 33.7,16.9 34.1,16.5 37.6,16.5 38.8,15.3 v1(38.8,13.7) ; J2.6@38.07,0 38.07,1.61 38.07,2.73 37.7,3.1 37.7,4.866 38.434,5.6 40.1,5.6 40.8,6.3 v1(40.8,10.5) ; v1(46.204,4.904) 46.204,4.9 46.734,4.9 48.2,6.366 U2.31
  Bottom Layer w0.2: J2.6@38.07,0 38.07,1.61 38.07,4.7 38.47,5.1 40.7,5.1 41,5.4 45.7,5.4 46.2,4.9 v1(46.204,4.904) ; v1(38.8,13.7) 40.4,12.1 40.4,10.9 v1(40.8,10.5)
GPIO21: J2.7 R32.2 U2.32 U3.36 | length 43.1
  Top Layer w0.2: U3.36 35.15,13.75 35.4,14 R32.2 35.9,15.3 36.7,16.1 37.4,16.1 38.2,15.3 v1(38.2,14.3) ; J2.7@40.61,0 40.61,1.61 39.32,2.9 38.5,2.9 38.1,3.3 38.1,4.7 38.6,5.2 40.266,5.2 41.2,6.134 41.2,10.1 v1(41.6,10.5) ; v1(46.2,4.1) 46.5,4.1 48.6,6.2 U2.32
  Bottom Layer w0.2: v1(38.2,14.3) 39,14.3 40.8,12.5 40.8,11.3 v1(41.6,10.5) ; J2.7@40.61,0 40.61,1.61 40.61,4.41 41.25,5.05 45.25,5.05 v1(46.2,4.1)
GPIO22: J2.9 U2.34 | length 10.9
  Top Layer w0.2: U2.34 49.4,6 49.8,5.6 49.8,3.2 v1(49.5,2.9)
  Bottom Layer w0.2: J2.9@45.69,0 J2.9@45.69,1.61 ; J2.9@45.69,2.09 J2.9@45.69,1.61 ; v1(49.5,2.9) 47.2,2.9 45.91,1.61 J2.9@45.69,1.61
GPIO24: R2.1 R4.2 U2.36 | length 22.3
  Top Layer w0.2: v1(50.007,6.273) 50.007,6.293 50,6.3 50.2,6.5 U2.36 ; v1(66.5,6.3) 66.8,6 68,6 68.8,5.2 R4.2 R2.1
  Bottom Layer w0.2: v1(50.007,6.273) 50.727,6.273 50.9,6.1 57.7,6.1 58.6,7 65.8,7 v1(66.5,6.3)
GPIO25: R11.2 U2.37 | length 25.6
  Top Layer w0.2: v1(50.409,5.7) 50.4,5.7 50.6,5.9 U2.37 ; v1(64.5,6.4) 64.5,7.7 65.8,9 65.8,10.734 67.266,12.2 69,12.2 69.3,12.5 R11.2
  Bottom Layer w0.2: v1(50.409,5.7) 57.866,5.7 58.766,6.6 64.3,6.6 v1(64.5,6.4)
GPIO26/ADC0: J2.11 U2.38 | length 7.2
  Top Layer w0.2: J2.11@50.77,0 50.77,1.61 51,1.84 U2.38
GPIO27/ADC1: J2.12 U2.39 | length 6.4
  Top Layer w0.2: U2.39 51.4,3.2 52.99,1.61 J2.12@53.31,1.61
GPIO28/ADC2: J2.14 U2.40 | length 11
  Top Layer w0.2: U2.40 51.8,3.4 52.5,2.7 57.1,2.7 58.19,1.61 J2.14@58.39,1.61
GPIO29/ADC3: Q1.2 U2.41 | length 6.3
  Top Layer w0.2: U2.41 52.2,3.6 52.6,3.2 54.55,3.2 Q1.2
LINKn: R29.2 U3.25 | length 18.1
  Top Layer w0.2: R29.2 v1(19.7,3.9) ; v1(26.4,9) 29.6,9 30.35,8.25 U3.25
  Bottom Layer w0.2: v1(19.7,3.9) 20.3,3.3 22.3,3.3 23,4 23,6 26,9 v1(26.4,9)
NetC3_2: C3.2 U1.4 | length 2.4
  Top Layer w0.5: U1.4 65.45,7.75 66.2,8.5 C3.2
NetC25_1: C25.1 Q1.3 R5.1 R8.2 | length 4.1
  Top Layer w0.2: Q1.3 56.8,5.1 57.2,5.5 R8.2 58,5.4 C25.1 R5.1
NetC27_1: C27.1 R14.1 Y1.3 | length 2.4
  Top Layer w0.2: R14.1 C27.1 41.1,13.3 Y1.3
NetC28_2: C28.2 P2.2 R28.2 | length 3.9
  Top Layer w0.5: P2.2 16.625,13.675 16.8,13.5 R28.2 C28.2
NetC29_2: C29.2 U3.22 | length 3.1
  Top Layer w0.2: U3.22 30.75,6.05 31.9,4.9 C29.2
NetC30_2: C30.2 P2.5 R21.1 R22.1 | length 12.9
  Top Layer w0.5: P2.5 13.9,11.115 13.9,11.9 14.4,12.4 16,12.4 16.5,11.9 16.5,10.9 16.9,10.5 v1(17.3,10.5) R21.1 ; v1(17.3,7.5) R22.1 C30.2
  Bottom Layer w0.5: v1(17.3,7.5) v1(17.3,10.5)
NetC33_2: C33.2 R23.1 Y2.3 | length 2.4
  Top Layer w0.3: R23.1 C33.2 Y2.3@37.7,11.5 ; 37.5,11.5 Y2.3@37.9,11.1
NetC35_1: C35.1 R18.1 R22.2 | length 2.6
  Top Layer w0.2: R22.2 C35.1 19.3,8.8 20.1,8.8 R18.1
NetC35_2: C35.2 P2.4 | length 9.7
  Top Layer w0.2: P2.4 15.19,10.255 15,10.065 14.399,10.065 13.7,9.366 13.7,7.834 14.384,7.15 15.85,7.15 17.5,8.8 17.7,8.8 C35.2
NetC36_1: C36.1 R17.1 R21.2 | length 2.6
  Top Layer w0.2: R21.2 C36.1 19.3,9.2 20.1,9.2 R17.1
NetC36_2: C36.2 P2.6 | length 8.3
  Top Layer w0.2: P2.6 15.19,9.475 15,9.665 14.565,9.665 14.1,9.2 14.1,8 14.55,7.55 15.684,7.55 17.334,9.2 17.7,9.2 C36.2
NetC37_2: C37.2 U3.20 | length 2
  Top Layer w0.3: C37.2 29.75,5.339 U3.20
NetLD1_1: LD1.1 R1.2 | length 1.2
  Top Layer w0.2: LD1.1 R1.2
NetLD2_1: LD2.1 R11.1 | length 1.2
  Top Layer w0.2: R11.1 LD2.1
NetP2_1: P2.1 R16.1 R19.1 | length 14.8
  Top Layer w0.2: R19.1 v1(19.7,11.5) R16.1
  Bottom Layer w0.2: P2.1 12.65,14.125 12.9,13.875 13.475,13.875 13.8,14.2 13.8,14.666 14.334,15.2 19.366,15.2 20.8,13.766 20.8,12.234 20.366,11.8 20,11.8 v1(19.7,11.5)
NetP2_3: P2.3 R15.1 R20.1 | length 13.5
  Top Layer w0.2: R20.1 v1(19.7,12.5) R15.1
  Bottom Layer w0.2: P2.3 12.65,13.225 12.9,13.475 13.641,13.475 14.2,14.034 14.2,14.5 14.5,14.8 19.2,14.8 20.4,13.6 20.4,12.4 20.2,12.2 20,12.2 v1(19.7,12.5)
NetP2_9: P2.9 R29.1 | length 33.9
  Top Layer w0.2: R29.1 v1(18,4.6)
  Bottom Layer w0.2: P2.9 1.22,8.68 2.5,7.4 2.5,6 1.7,5.2 1.7,3.1 3.7,1.1 14.5,1.1 v1(18,4.6)
NetP2_11: P2.11 R30.1 | length 22.8
  Top Layer w0.2: v1(18,2.2) R30.1
  Bottom Layer w0.2: P2.11 1.22,2.98 3.5,0.7 14.7,0.7 16.2,2.2 v1(18,2.2)
NetR6_2: R6.2 U2.47 | length 16.8
  Top Layer w0.2: v1(52.6,9.7) 52.8,9.5 U2.47 ; v1(66.4,10.35) 66.55,10.2 67.5,10.2 67.6,10.2 R6.2
  Bottom Layer w0.2: v1(52.6,9.7) 52.8,9.5 64.6,9.5 65.3,10.2 66.25,10.2 v1(66.4,10.35)
NetR9_2: R9.2 U2.46 | length 16.8
  Top Layer w0.2: v1(52.6,8.9) 52.8,9.1 U2.46 ; v1(66.4,9.65) 66.55,9.8 67.6,9.8 R9.2
  Bottom Layer w0.2: v1(52.6,8.9) 52.8,9.1 64.766,9.1 65.466,9.8 66.25,9.8 v1(66.4,9.65)
NetR10_1: R10.1 U2.43 | length 2.6
  Top Layer w0.2: U2.43 53.6,7.9 55,6.5 R10.1
NetR15_2: R15.2 U3.1 | length 4.3
  Top Layer w0.2: R15.2 21.7,12.2 21.9,12.2 23.4,13.7 24.9,13.7 U3.1
NetR16_2: R16.2 U3.2 | length 4.3
  Top Layer w0.2: R16.2 21.7,11.8 22.066,11.8 23.566,13.3 24.9,13.3 U3.2
NetR17_2: R17.2 U3.5 | length 5.1
  Top Layer w0.2: R17.2 21.7,9.2 21.9,9.2 22.7,10 22.7,10.666 23.734,11.7 24.9,11.7 U3.5
NetR18_2: R18.2 U3.6 | length 5.1
  Top Layer w0.2: R18.2 21.7,8.8 22.066,8.8 23.1,9.834 23.1,10.5 23.9,11.3 24.9,11.3 U3.6
NetR26_2: R26.2 SW1.1 | length 1.2
  Top Layer w0.2: SW1.1 67.15,16.4 R26.2
NetR27_1: R27.1 U3.10 | length 5.3
  Top Layer w0.2: R27.1 22,6.5 23.2,7.7 23.2,8.662 23.788,9.25 U3.10
NetR31_1: R31.1 SW2.1 | length 1.2
  Top Layer w0.2: R31.1 56.85,16 SW2.1
QSPI1_SCLK: U2.52 U4.6 | length 6.4
  Top Layer w0.2: U2.52 54.08,11.5 54.5,11.92 54.5,12.1 55.5,13.1 56.6,13.1 58.065,11.635 U4.6
QSPI1_SD0: U2.53 U4.5 | length 6.1
  Top Layer w0.2: U2.53 53.914,11.9 54.09,12.076 54.09,12.29 55.3,13.5 56.8,13.5 57.395,12.905 U4.5
QSPI1_SD1: U2.55 U4.2 | length 16.4
  Top Layer w0.2: U2.55 53.914,12.7 55.114,13.9 65,13.9 65.5,13.4 65.5,11.6 64.9,11 64.9,10.365 U4.2
QSPI1_SD2: U2.54 U4.3 | length 14.3
  Top Layer w0.2: v1(52.6,12.3) U2.54 ; U4.3 64.835,11.635 64.9,11.7 v1(64.9,12.2)
  Bottom Layer w0.2: v1(52.6,12.3) 53.1,12.3 53.3,12.5 64.6,12.5 v1(64.9,12.2)
QSPI1_SD3: U2.51 U4.7 | length 6.4
  Top Layer w0.2: U2.51 54.3,11.1 v1(55.1,11.9) ; v1(57.5,10.7) 57.835,10.365 U4.7
  Bottom Layer w0.2: v1(55.1,11.9) 56.9,11.9 57.5,11.3 v1(57.5,10.7)
QSPI1_SS_N: R25.1 R26.1 U2.56 U4.1 | length 23.6
  Top Layer w0.2: v1(52.6,13.1) U2.56 ; U4.1 64.895,9.095 65.398,9.598 65.398,10.898 66.1,11.6 v1(66.1,12.2) 66.1,13.4 66.6,13.9 R25.1 R26.1
  Bottom Layer w0.2: v1(52.6,13.1) 53.1,13.1 53.3,12.9 65.4,12.9 v1(66.1,12.2)
RUN: J2.10 R31.2 U2.26 | length 26.5
  Top Layer w0.2: v1(47.4,12.3) 47.4,9.1 47,8.7 U2.26 45.4,8.7 45.2,8.5 45.2,4.7 45.6,4.3 45.6,3.4 47.39,1.61 48.23,1.61 J2.10@48.23,0 ; v1(53.3,14) 54.6,14 54.9,14.3 55.7,14.3 55.9,14.5 R31.2
  Bottom Layer w0.2: v1(47.4,12.3) 47.4,13.5 47.9,14 v1(53.3,14)
SWCLK: J3.1 U2.24 | length 13
  Top Layer w0.2: J3.1 40.4,2.9 42.8,2.9 43.2,3.3 43.2,4.5 44.4,5.7 44.4,8.866 45.034,9.5 U2.24
SWDIO: J3.3 U2.25 | length 6.5
  Top Layer w0.2: J3.3@44.38,4.3 44.8,4.72 44.8,8.7 45.2,9.1 U2.25
USB_DM: P1.2 R9.1 | length 2.2
  Top Layer w0.2: R9.1 69.2,9.8 69.766,9.8 69.941,9.975 70.765,9.975 P1.2
USB_DP: P1.3 R6.1 | length 2.2
  Top Layer w0.2: R6.1 69.2,10.2 69.6,10.2 69.775,10.375 70.765,10.375 P1.3
VBUS: D1.2 J2.20 P1.1 R2.2 | length 12.5
  Top Layer w0.45: R2.2 69.2,7.7 69.7,8.2 69.7,8.9 70,9.2 P1.1
  Top Layer w0.5: D1.2 67.75,7.2 R2.2 69.3,7.2 70.6,5.9 70.6,4.1 73.09,1.61 J2.20@73.63,1.61
VSYS: C1.2 D1.1 J2.19 R3.1 R5.2 U1.1 | length 17.8
  Top Layer w0.2: R5.2 59.7,2.8 61.4,2.8 C1.2
  Top Layer w0.5: C1.2 63.55,3.6 ; U1.1 63.55,3.6 ; R3.1 v1(63.9,3) 63.55,3.35 63.55,3.6 ; D1.1 v1(67.7,3.3) 68,3 70.3,3 71.09,2.21 J2.19@71.09,1.61
  Bottom Layer w0.5: v1(63.9,3) 67.4,3 v1(67.7,3.3)
XI: C32.2 R24.1 U3.30 Y2.1 | length 9.6
  Top Layer w0.3: U3.30 34.05,10.75 34.8,10 34.8,9.2 35.5,8.5 R24.1 C32.2 36.9,8 37.1,7.8 39.5,7.8 39.7,8 Y2.1
XIN: C26.1 R13.2 U2.20 Y1.1 | length 7.8
  Top Layer w0.2: Y1.1 44.45,15.25 44.7,15 44.7,12.7 44.5,12.5 C26.1 R13.2 44.5,11.1 U2.20
XO: R23.2 R24.2 U3.31 | length 4.9
  Top Layer w0.3: U3.31 34.257,11.25 35.3,10.207 35.3,9.7 35.5,9.5 R24.2 R23.2
XOUT: R13.1 R14.2 U2.21 | length 5.1
  Top Layer w0.2: R14.2 R13.1 43.1,11 43.4,10.7 U2.21
pads on no net: P1.4 P2. P2.7 P2.8 SW1.0 SW2.0 U2.35 U3.7 U3.12 U3.13 U3.18 U3.23 U3.24 U3.26 U3.38 U3.39 U3.40 U3.41 U3.42 U3.46 U3.47

## Polygon pours and split planes (outlines as drawn)
GND on Bottom Layer "NONET_L-01_P-001" (solid, remove dead copper, pour order 1): 17,0 17,21 75,21 75,0
GND on Top Layer "r" (solid, remove dead copper, pour order 0): 17,0 17,21 75,21 75,0

## Keep-outs
Keep-Out Layer:
  text ".Layer_Name" at 13.398,24 h1.52

## Other copper
Top Layer:
  region net 3V3: 61.3,5.5 62.7,5.5 63.5,6.3 63.9,6.3 63.9,7.9 63.1,7.9 62.3,7.1 61.5,7.1 60.9,6.5 60.9,5.9
  region net 3V3_EN: 65.2,0.5 65.2,2.6 65.1,2.7 65.1,5.7 66.3,5.7 66.8,5.2 66.8,0.5
  text ".Layer_Name" at 13.398,24 h1.52
Bottom Layer:
  region net 3V3: 64.2,1.1 64.2,2 63.3,2.9 63.3,5.4 62.4,6.3 61.3,6.3 60.9,5.9 60.9,5.4 61.9,4.4 61.9,2.2 63,1.1
  text ".Layer_Name" at 13.398,24 h1.52
Multi-Layer:
  pour cut-out: 71.1,16.2 ccw(c73,16.2) 73,14.3 ccw(c73,16.2) 74.9,16.2 ccw(c73,16.2) 73,18.1 ccw(c73,16.2)
  pour cut-out: 71.1,4.8 ccw(c73,4.8) 73,2.9 ccw(c73,4.8) 74.9,4.8 ccw(c73,4.8) 73,6.7 ccw(c73,4.8)
  pour cut-out: 50.77,2.713 53.38,2.713 53.38,2.5 50.77,2.5
  pour cut-out: 58.39,2.713 61,2.713 61,2.5 58.39,2.5
  pour cut-out: 71.1,4.894 71.1,2.7 70.9,2.5 71.5,2.5 71.5,4.9
  pour cut-out: 71.1,16.106 71.1,18.3 70.9,18.5 71.5,18.5 71.5,16.1
  pour cut-out: 66.01,18.287 58.39,18.287 58.39,18.5 66.01,18.5
  pour cut-out: 53.3,18.287 45.62,18.287 45.62,18.5 53.3,18.5
  pour cut-out: 40.61,18.287 33,18.287 33,18.5 40.61,18.5
  pour cut-out: 27.91,18.287 25.3,18.287 25.3,18.5 27.91,18.5
  pour cut-out: 25.37,2.713 27.98,2.713 27.98,2.5 25.37,2.5
  pour cut-out: 32.99,2.713 37.6,2.713 37.6,2.5 32.99,2.5

## Silkscreen, mask and mechanical layers (free items; w line width, h text height)
Top Overlay:
  text ".Layer_Name" at 13.398,24.032 h1.52
  text "20" at 23.518,19.5 h1.5 r270
  text "Rev 1.0" at 0.8,19 h1.5
  text "1" at 73.8,18.4 h1.5 r270
  text "2" at 70.662,18.219 h1.5 r270
  text "LED" at 69.8,16.8 h1 r270
  text "W5500-EVB-Pico" at 35.2,16.5 h1.5
  text "W5500-EVB-Pico" at 35.2,16.5 h1.5
  text "RUN" at 58.1,13.5 h1
  text "BOOTSEL" at 62.8,13.5 h1
  text "PWR" at 60.9,5.5 h1 r270
  text "DEBUG" at 40.2,5.2 h1
  text "21" at 24.9,4.2 h1.5 r270
  text "39" at 70.318,4.2 h1.5 r270
  text "Made by WIZnet" at 0.7,0.1 h1.5
Bottom Overlay:
  lines w0.254: 25.4,5.7 25.4,6.4 38,6.4 38,5.7 ; 27.9,5.7 27.9,6.4 ; 33,5.7 33,6.4 ; 35.5,5.7 35.5,6.4 ; 37.1,5.7 37.1,6.3
  text ".Layer_Name" at 13.398,24 h1.52
  text "GND" at 30.114,15.8 h1.2 r270
  text "GND" at 42.714,15.8 h1.2 r270
  text "GP9" at 45.414,15.8 h1.2 r270
  text "GP8" at 47.914,15.8 h1.2 r270
  text "GP7" at 50.414,15.8 h1.2 r270
  text "GP6" at 53.014,15.8 h1.2 r270
  text "GND" at 55.514,15.8 h1.2 r270
  text "GP5" at 57.814,15.8 h1.2 r270
  text "GP4" at 60.614,15.8 h1.2 r270
  text "GP3" at 63.214,15.8 h1.2 r270
  text "GP2" at 65.714,15.8 h1.2 r270
  text "GND" at 68.114,15.8 h1.2 r270
  text "GP1" at 69.314,15.8 h1.2 r270
  text "GP0" at 70.214,15.8 h1.2 r270
  text "GP15" at 25.014,15.3 h1.2 r270
  text "GP14" at 27.614,15.3 h1.2 r270
  text "GP13" at 32.714,15.3 h1.2 r270
  text "GP12" at 35.214,15.3 h1.2 r270
  text "GP11" at 37.814,15.3 h1.2 r270
  text "GP10" at 40.214,15.3 h1.2 r270
  text "Connected to W5500" at 37,6.714 h1.2
  text "SWCLK" at 38.914,4.9 h1.2 r270
  text "GND" at 41.414,4.9 h1.2 r270
  text "SWDIO" at 44.014,4.9 h1.2 r270
  text "GP16" at 25.014,2.9 h1.2 r270
  text "GP17" at 27.514,2.9 h1.2 r270
  text "GND" at 30.014,2.9 h1.2 r270
  text "GP18" at 32.614,2.9 h1.2 r270
  text "GP19" at 35.114,2.9 h1.2 r270
  text "GP20" at 36.714,2.9 h1.2 r270
  text "GP21" at 37.614,2.9 h1.2 r270
  text "GND" at 45.314,2.9 h1.2 r270
  text "GP22" at 46.214,2.9 h1.2 r270
  text "RUN" at 48.014,2.9 h1.2 r270
  text "GP26_A0" at 50.412,2.9 h1.2 r270
  text "AGND" at 55.414,2.9 h1.2 r270
  text "GP27_A1" at 52.836,2.861 h1.2 r270
  text "GP28_A2" at 58.036,2.861 h1.2 r270
  text "ADC_VREF" at 60.536,2.861 h1.2 r270
  text "3V3" at 63.014,2.8 h1.2 r270
  text "3V3_EN" at 65.712,2.8 h1.2 r270
  text "GND" at 68.114,2.8 h1.2 r270
  text "VSYS" at 69.414,2.8 h1.2 r270
  text "VBUS" at 70.314,2.8 h1.2 r270
Top Paste:
  text ".Layer_Name" at 13.398,24 h1.52
Bottom Paste:
  text ".Layer_Name" at 13.398,24 h1.52
Top Solder:
  text ".Layer_Name" at 13.398,24 h1.52
Bottom Solder:
  text ".Layer_Name" at 13.398,24 h1.52
Drill Guide:
  text ".Layer_Name" at 13.398,24 h1.52
Mechanical 2:
  lines w0.127: 79.85,12 104,12 ; 78.85,4.775 ccw(c79.561,4.775) 79.561,4.064 104.239,4.064 ccw(c104.239,4.775) 104.95,4.775 104.95,20.503 ccw(c104.239,20.503) 104.239,21.214 79.561,21.214 ccw(c79.561,20.503) 78.85,20.503 78.85,4.775
  lines w0.2: 0,0 75,0 75,21 0,21 0,0
  text "BOARD NAME : W5500-EVB-Pico" at 4,35.176 h1.52
  text "VERSION : V100" at 4,32.382 h1.52
  text "SIZE : 75mmX21mmX1.0T" at 4,29.588 h1.52
  text "GERBER DATE : 2022.01.28" at 4,26.794 h1.52
  text "LAYER :" at 4,24 h1.52
  text "Layer Stack Up Detail for:" at 80.323,18.606 h1.02
  text "W5500-EVB-Pico_V100.PcbDoc" at 80.196,16.193 h1
  text "Layer Name : 2L  1.0T" at 80.323,13.018 h1.02
  text "Top Layer" at 80.196,9.335 h1.52
  text "Bottom Layer" at 80.196,6.334 h1.52
  text "KS Technology artwork" at 78.85,0 h5.08
Drill Drawing:
  text ".Layer_Name" at 13.398,24 h1.52
  text ".Legend" at 79.85,22.75 h1.02

## Dimensions
-0.5,0 to -0.5,21 on Mechanical 2
0,-0.4 to 75,-0.5 on Mechanical 2

## Text inside footprints (layer, text, board x,y; h text height)
P2: Mechanical 3 "9" at -0.812,17.104 h0.76 r270; Mechanical 3 "11" at -0.812,7.071 h0.76 r270; Mechanical 3 "10" at 0.966,14.818 h0.76 r270; Mechanical 3 "12" at 0.966,4.658 h0.76 r270; Mechanical 3 "1" at 12.269,16.342 h0.76 r270; Mechanical 3 "7" at 12.269,6.309 h0.76 r270; Mechanical 3 "2" at 14.809,15.326 h0.76 r270; Mechanical 3 "8" at 14.809,5.039 h0.76 r270
U3: Mechanical 3 "WIZnet" at 29.508,13.286 h0.91 r270